# Altium PCB IP5328P BMS.PcbDoc
Units mil, origin at the board's own origin, x right, y up, seen from the top; angles counter-clockwise.
Board outline 3000 x 2500 mil, 2 copper layers (Top Layer, Bottom Layer); 48 components, 37 nets, 168 pads, 9 vias.
Unrouted connection lines stored in the file: 111.
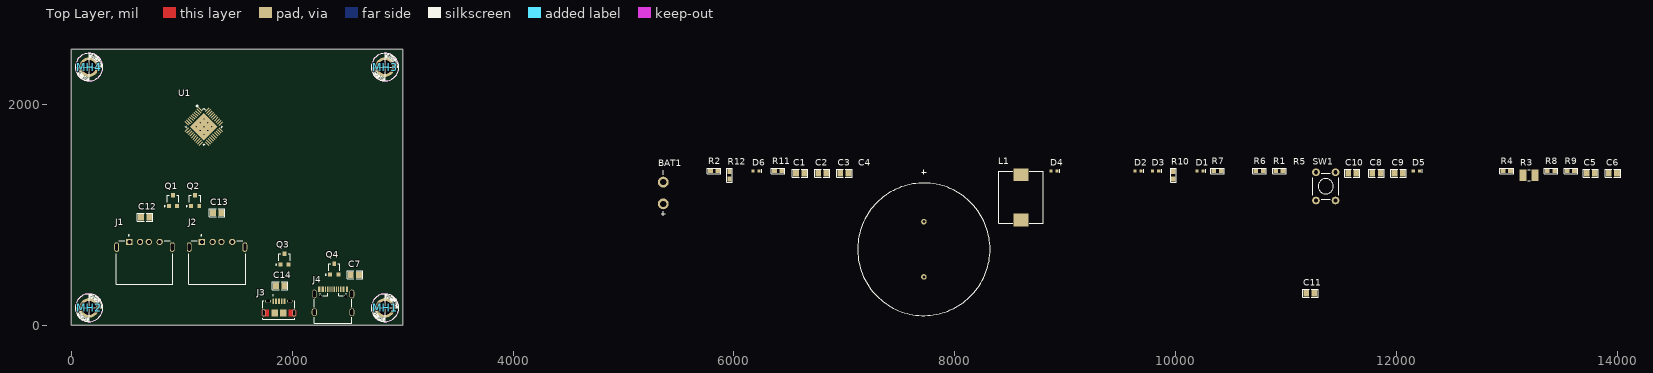
[diagram p0: Top Layer view]
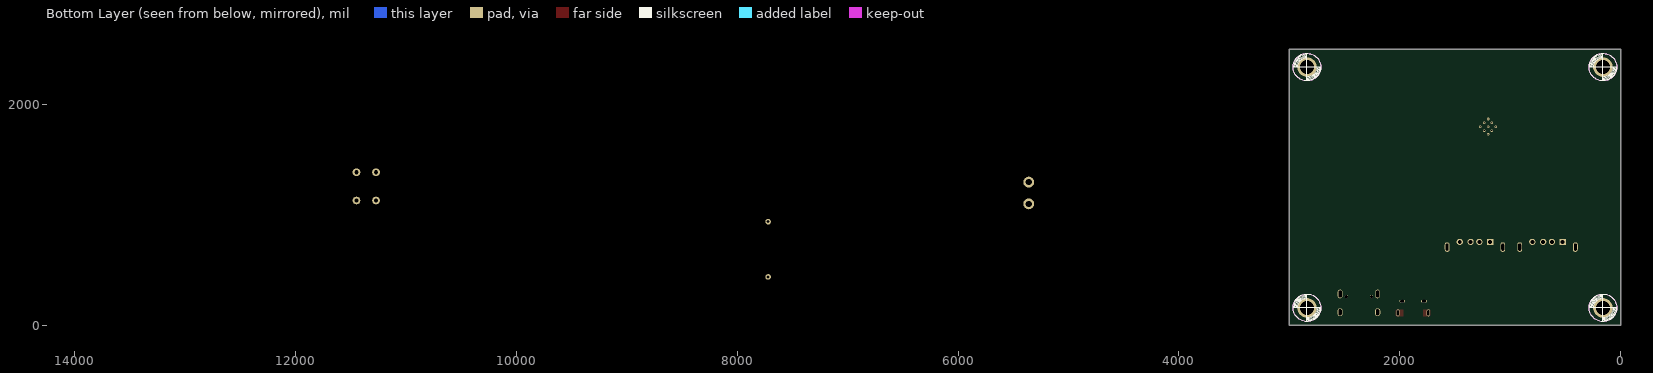
[diagram p1: Bottom Layer view, seen from below]

## Layer stack, top to bottom
Top Solder: solder mask 0.4, Solder Resist, Dk 3.5
Top Layer: signal copper 1.4
Dielectric 1: dielectric 12.6, FR-4, Dk 4.8
Bottom Layer: signal copper 1.4
Bottom Solder: solder mask 0.4, Solder Resist, Dk 3.5

## Board outline
0,0 3000,0 3000,2500 0,2500

## Design rules (kind name [scope] priority, off if disabled: settings)
Clearance [All] p1: gap=10 ignorepadtopadclearanceinfootprint=FALSE except(0: Arc-Hole Track-Hole SMDPad-Hole THPad-Hole Via-Hole Fill-Hole Poly-Hole Region-Hole Text-Hole; 7: Arc-Arc Arc-Track Track-Track; 8: SMDPad-SMDPad SMDPad-THPad)
MinimumSolderMaskSliver [All] p1: minsoldermaskwidth=3.94
PolygonConnect [All] p1: connectstyle=Relief reliefconductorwidth=10 reliefentries=4 polygonreliefangle="90 Angle" airgapwidth=10
RoutingVias [All] p1: holewidth=28 width=50 viastyle="Through Hole" minholewidth=28 minwidth=50 maxholewidth=28 maxwidth=50
SilkToSolderMaskClearance [IsPad] p1: minsilkscreentomaskgap=5 clearancetoexposedcopper=TRUE
SolderMaskExpansion [All] p1: expansion=4 istentingtop=FALSE
Width [All] p1: maxlimit=10 minlimit=10 preferedwidth=10
28 further rules are at their usual default settings.

## Components (designator, comment, footprint, x,y, rotation, side; value= is the part's Value field where it differs from the comment)
BAT1 "ICR18650C2" "Battery Wire Pads" 5360,1200 r90 top
C1 "22uF" "CAP 2012[0805]" 6600,1380 r0 top
C2 "22uF" "CAP 2012[0805]" 6800,1380 r0 top
C3 "22uF" "CAP 2012[0805]" 7000,1380 r0 top
C4 "220uF" Capacitor 7720,440 r90 top
C5 "2.2uF" "CAP 2012[0805]" 13760,1380 r0 top
C6 "2.2uF" "CAP 2012[0805]" 13960,1380 r0 top
C7 "10uF" "CAP 2012[0805]" 2567.4,460 r180 top
C8 "100nF" "CAP 2012[0805]" 11820,1380 r0 top
C9 "22uF" "CAP 2012[0805]" 12020,1380 r0 top
C10 "100nF" "CAP 2012[0805]" 11600,1380 r0 top
C11 "100nF" "CAP 2012[0805]" 11220,290 r0 top
C12 "10uF" "CAP 2012[0805]" 667.4,980 r0 top
C13 "10uF" "CAP 2012[0805]" 1320,1020 r0 top
C14 "10uF" "CAP 2012[0805]" 1890,360 r180 top
D1 "SZYY0603G" "LED 0603" 10220,1400 r0 top
D2 "SZYY0603G" "LED 0603" 9660,1400 r0 top
D3 "SZYY0603G" "LED 0603" 9820,1400 r0 top
D4 "SZYY0603G" "LED 0603" 8900,1400 r0 top
D5 "SZYY0603G" "LED 0603" 12180,1400 r0 top
D6 "SZYY0603G" "LED 0603" 6200,1400 r0 top
J1 "USB1125-GF-B_REVA" GCT_USB1125-GF-B_REVA 661.42,710 r0 top
J2 "USB1125-GF-B_REVA" GCT_USB1125-GF-B_REVA 1318.58,710 r0 top
J3 "10118194-0001LF" AMPHENOL_10118194-0001LF 1878.82,113.7 r0 top
J4 "918-418K2023S40001" 918-418K2023S40001 2200,285.35 r0 top
L1 "22uH" YSPI1050-2R2M 8600,1160 r90 top
MH1 "MH 3.2MM W/CLEARANCE" "3.2mm Mounting Hole w/clearance" 2840,160 r0 top
MH2 "MH 3.2MM W/CLEARANCE" "3.2mm Mounting Hole w/clearance" 160,160 r0 top
MH3 "MH 3.2MM W/CLEARANCE" "3.2mm Mounting Hole w/clearance" 2840,2340 r0 top
MH4 "MH 3.2MM W/CLEARANCE" "3.2mm Mounting Hole w/clearance" 160,2340 r0 top
Q1 "RU207C" SOT-23-3 920,1130 r0 top
Q2 "RU207C" SOT-23-3 1120,1130 r0 top
Q3 "RU20P7C" SOT-23-3 1930,600 r0 top
Q4 "RU20P7C" SOT-23-3 2380,510 r0 top
R1 "10K" "RES 1608[0603]" 10940,1400 r0 top
R2 "10K" "RES 1608[0603]" 5820,1400 r0 top
R3 "0.01R" "RES 3225[1210]" 13200,1360 r0 top
R4 "82K" "RES 1608[0603]" 13000,1400 r0 top
R5 "NTC 100K" "temp through hole component" 11060,1420 r90 top
R6 "100R" "RES 1608[0603]" 10760,1400 r0 top
R7 "100R" "RES 1608[0603]" 10380,1400 r0 top
R8 "100R" "RES 1608[0603]" 13400,1400 r0 top
R9 "1K" "RES 1608[0603]" 13580,1400 r0 top
R10 "100R" "RES 1608[0603]" 9980,1360 r90 top
R11 "110K" "RES 1608[0603]" 6400,1400 r0 top
R12 "Res 0R" "RES 1608[0603] EMPTY" 5960,1360 r90 top
SW1 "Switch SPST" "TACTILE SW NO" 11360,1260 r0 top
U1 "IP5328P" "QFN-40 6x6mm EP" 1200,1800 r315 top

## Footprints (in the part's own frame and the unit in brackets; to place one, negate y for a bottom-side part, rotate by r counter-clockwise, add the part's x,y. Pads: shape width x height; smd on the part's side, far side on the other; paste and mask are expansions set on the pad)
"3.2mm Mounting Hole w/clearance" [mm] "3.2mm mounting hole with 125mil clearance"
  round 4.5 hole 3.2: 1(0,0)
  Keep-Out Layer circle w0.254: c0,0 r3.175
  Keep-Out Layer circle w0.254: c0,0 r3.175
  silkscreen extent -3.17,-3.18 3.18,3.17
918-418K2023S40001 [mm]
  rect 0.5x1.3 smd mask+0.051: A1/B12(1.12,1.067) A4/B9(1.92,1.067) B1/A12(7.516,1.067) B4/A9(6.716,1.067)
  rect 0.28x1.3 smd mask+0.051: A5(3.07,1.067) A6(4.07,1.067) A7(4.566,1.067) A8(5.566,1.067) B5(6.066,1.067) B6(5.066,1.067) B7(3.57,1.067) B8(2.57,1.067)
  oval 1.1x2 hole 0.7 slot 1.6 at 90 deg mask+0.051: G1(0,0) G3(8.636,0)
  oval 1.2x1.8 hole 0.7 slot 1.4 at 90 deg mask+0.051: G2(0,-4.2) G4(8.636,-4.2)
  round 0.75 hole 0.75 unplated mask+0: NC(1.43,-0.61) NC(7.206,-0.61)
  silkscreen extent 0,-6.76 8.64,0.13
AMPHENOL_10118194-0001LF [mm]
  rect 0.4x1.35 smd mask+0.05: 1(-1.3,2.7) 2(-0.65,2.7) 3(0,2.7) 4(0.65,2.7) 5(1.3,2.7)
  oval 1.3x0.65 hole 0.55 slot 0.85 at 0 deg: S1(-2.5,2.7) S2(2.5,2.7)
  oval 0.775x1.55 hole 0.5 slot 1.15 at 90 deg: S3(-3.5,0) S6(3.5,0)
  rect 1.5x1.55 smd: S4(-1,0) S5(1,0)
  Top Layer region: 193 vertices and 0 holes, not listed, extent -4,-0.775 -2.3,0.78
  Top Layer region: 193 vertices and 0 holes, not listed, extent 2.3,-0.78 4,0.775
  silkscreen extent -3.7,-1.45 3.7,4.2, body extent -4.02,-2.66 4.02,2.92, height 2.69
"Battery Wire Pads" [mm]
  round 2.5 hole 1.4: BAT+(-2.5,0) BAT-(2.5,0)
  silkscreen extent -5.26,-0.51 5.25,0.51
"CAP 2012[0805]" [mm] "Capacitor, NP, 2012[0805]"
  rect 1.3x1.5 smd: 1(-0.95,0) 2(0.95,0)
  silkscreen extent -1.78,-0.91 1.78,0.91, body extent -0.99,-0.64 1.01,0.62, height 0.78
Capacitor [mil]
  round 50 hole 28: 1(0,0) 2(500,0)
  silkscreen extent -350,-600 970,600
GCT_USB1125-GF-B_REVA [mm]
  rect 1.428x1.428 hole 0.92: 1(-3.5,1.2)
  round 1.428 hole 0.92: 2(-1,1.2) 3(1,1.2) 4(3.5,1.2)
  oval 1.108x2.216 hole 0.6 slot 1.6 at 90 deg: S1(-6.4,0) S2(6.4,0)
  silkscreen extent -6.55,-8.55 6.55,2.8
"LED 0603" [mm] "SMT LED w/0603 footprint"
  rect 0.7x0.7 smd: 1(-0.7,0) 2(0.7,0)
  silkscreen extent 1.35,-0.38 1.35,0.38, body extent -0.8,-0.4 0.8,0.4, height 0.4
"QFN-40 6x6mm EP" [mm] "6mm x 6mm QFN-40 w/exposed pad"
  rect 1.25x0.28 smd mask+0.05: 1(-3.375,2.25) 10(-3.375,-2.25) 21(3.275,-2.25) 30(3.275,2.25)
  rect 1.35x0.28 smd mask+0.05: 2(-3.323,1.75) 3(-3.323,1.25) 4(-3.323,0.75) 5(-3.323,0.25) 6(-3.323,-0.25) 7(-3.323,-0.75) 8(-3.323,-1.25) 9(-3.322,-1.75) 22(3.225,-1.75) 23(3.225,-1.25) 24(3.225,-0.75) 25(3.225,-0.25) 26(3.225,0.25) 27(3.225,0.75) 28(3.225,1.25) 29(3.225,1.75)
  rect 0.28x1.25 smd mask+0.05: 11(-2.25,-3.275) 20(2.25,-3.275) 31(2.25,3.275) 40(-2.25,3.275)
  rect 0.28x1.35 smd mask+0.05: 12(-1.75,-3.225) 13(-1.25,-3.225) 14(-0.75,-3.225) 15(-0.25,-3.225) 16(0.25,-3.225) 17(0.75,-3.225) 18(1.25,-3.225) 19(1.75,-3.225) 32(1.75,3.225) 33(1.25,3.225) 34(0.75,3.225) 35(0.25,3.225) 36(-0.25,3.225) 37(-0.75,3.225) 38(-1.25,3.225) 39(-1.75,3.225)
  rect 4.5x4.5 smd mask+0.07: PAD(0,0)
  silkscreen extent -4.55,-3 3,3, body extent -3.08,-3.07 3.08,3.08, height 1.04
"RES 1608[0603]" [mm] "Resistor 1608[0603]"
  rect 1.1x1 smd: 1(-0.85,0) 2(0.85,0)
  silkscreen extent -1.57,-0.66 1.57,0.66, body extent -0.76,-0.41 0.84,0.39, height 0.4
"RES 1608[0603] EMPTY" [mm] "Resistor 1608[0603]"
  rect 1.1x1 smd: 1(-0.85,0) 2(0.85,0)
  silkscreen extent -1.57,-0.66 1.57,0.66
"RES 3225[1210]" [mm] "Resistor - 3225[1210]"
  rect 1.6x2.7 smd: 1(-1.4,0) 2(1.4,0)
  silkscreen extent -0.3,-1.25 0.3,1.25, body extent -1.63,-1.24 1.57,1.26, height 0.55
SOT-23-3 [mm] "SOT-23-3 (standard pin numbering)"
  rect 0.9x0.95 smd: 1(-0.95,-1.25) 2(0.95,-1.25) 3(0,1.25)
  silkscreen extent -2.07,-1.37 1.3,1.25, body extent -1.5,-1.28 1.5,1.22, height 1.06
"TACTILE SW NO" [mil] "Normally-open tactile, PTH, TE 1825910-2 or equiv"
  round 70 hole 40: 1(88.5,128) 2(88.5,-128) 3(-88.5,128) 4(-88.5,-128)
  silkscreen extent -118,-118 118,118, body extent -118,-154 118,153, height 170
"temp through hole component" [mil]
YSPI1050-2R2M [mil] "Precision Wire Wound Inductor, 2-Leads, Body 11.50x10.00mm, IPC Medium Density"
  rect 115.12x137.8 smd: 1(-205,0) 2(205,0)
  silkscreen extent -236,-203 236,203, body extent -230,-197 230,197, height 201

## Part data
BAT1: library part "Battery Multi", "Lithium Ion ICR18650 C2 2800mAh"
C1 C2 C3 C9: library part "Cap 22uF", "X5R 25V ±20% 22uF 0805 Multilayer Ceramic Capacitors MLCC - SMD/SMT ROHS", Mfg="Samsung Electro-Mechanics", Mfg PN=CL21A226MAQNNNE, Vendor=JLCPCB, Vendor PN=C45783
C4: library part "Cap 220uH Polarized"
C5 C6: library part "Cap 2.2uF", "25V 2.2uF X5R ±10% 0805 Multilayer Ceramic Capacitors MLCC - SMD/SMT ROHS", Mfg="Samsung Electro-Mechanics", Mfg PN=CL21A225KAFNNNE, Vendor=JLCPCB, Vendor PN=C87994
C7 C12 C13 C14: library part "Cap 10uF", "X5R 25V ±10% 10uF 0805 Multilayer Ceramic Capacitors MLCC - SMD/SMT ROHS", Mfg="Samsung Electro-Mechanics", Mfg PN=CL21A106KAYNNNE, Vendor=JLCPCB, Vendor PN=C15850
C8 C10 C11: library part "Cap 100nF", "100V 100nF X7R ±10% 0805 Multilayer Ceramic Capacitors MLCC - SMD/SMT ROHS", Mfg="Samsung Electro-Mechanics", Mfg PN=CL21B104KCFNNNE, Vendor=JLCPCB, Vendor PN=C28233
D1 D2 D3 D4 D5 D6: library part LED, "Emerald 0603 Light Emitting Diodes (LED) ROHS", Mfg="Yongyu Photoelectric", Mfg PN=SZYY0603G, Vendor=JLCPCB, Vendor PN=C434420
J1 J2: "USB 2.0 Receptacle, Type A,Through Hole, Horizontal, Top Mount, Without Flange", Package=Package, Availability=Unavailable, MF="Global Connector Technology", MP=USB1125-GF-B, Price=None, SnapEDA_Link=https://www.snapeda.com/parts/USB1125-GF-B/Global%20Connector%20Technology/view-part/4792084/?ref=snap
J3: "USB - micro B USB 2.0 Receptacle Connector 5 Position Surface Mount, Right Angle; Through Hole", Package=None, Availability=Unavailable, MF="Amphenol ICC", MP=10118194-0001LF, Price=None, SnapEDA_Link=https://www.snapeda.com/parts/10118194-0001LF/Amphenol%20FCI/view-part/1413308/?ref=snap
J4: "3A 1 16 Female Type-C SMD USB Connectors ROHS", Mfg="Jing Extension of the Electronic Co.", Mfg PN=918-418K2023S40001, Vendor=JLCPCB, Vendor PN=C167321
L1: library part "Power Inductor 22uH", "10A 2.2uH ±20% 6.6mΩ SMD,11.5x10x5mm Power Inductors ROHS", Mfg=YJYCOIN, Mfg PN=YSPI1050-2R2M, Vendor=JLCPCB, Vendor PN=C497893
Q1 Q2: "SOT-23-3 MOSFETs ROHS 20V/6A,", Mfg="Shenzhen ruichips Semicon", Mfg PN=RU207C, Vendor=LCSC, Vendor PN=C515680
Q3 Q4: "20V 5A 28mΩ@4.5V,5A 1.3W 1.1V@250μA P Channel SOT-23(SOT-23-3) MOSFETs ROHS", Mfg="Shenzhen ruichips Semicon", Mfg PN=RU20P7C, Vendor=LCSC, Vendor PN=C181984
R1 R2: library part "Res 10K", "±1% 1/10W Thick Film Resistors 75V ±100ppm/℃ -55℃~+155℃ 10kΩ 0603 Chip Resistor - Surface Mount ROHS", Mfg="UNI-ROYAL(Uniroyal Elec)", Mfg PN=0603WAF1002T5E, Vendor=JLCPCB, Vendor PN=C25804
R3: library part "Res 0.01R", "±1% 1/2W Thick Film Resistors 200V ±1500ppm/℃ -55℃~+155℃ 0.01Ω 1210 Chip Resistor - Surface Mount ROHS", Mfg=RALEC, Mfg PN=RTT12R010FTP, Vendor=JLCPCB, Vendor PN=C159310
R4: library part "Res 82K", "±1% 1/10W Thick Film Resistors 75V ±100ppm/℃ -55℃~+155℃ 82kΩ 0603 Chip Resistor - Surface Mount ROHS", Mfg="UNI-ROYAL(Uniroyal Elec)", Mfg PN=0603WAF8202T5E, Vendor=JLCPCB, Vendor PN=C23254
R5: library part "Thermistor 100K", "THERM NTC 100KOHM 4250K BEAD", Mfg="Murata Electronics", Mfg PN=NXFT15WF104FA1B025, Vendor=Digikey, Vendor PN=490-11856-ND
R6 R7 R8 R10: library part "Res 100R", "±1% 1/10W Thick Film Resistors 75V ±200ppm/℃ -55℃~+155℃ 100Ω 0603 Chip Resistor - Surface Mount ROHS", Mfg="UNI-ROYAL(Uniroyal Elec)", Mfg PN=0603WAF1000T5E, Vendor=JLCPCB, Vendor PN=C22775
R9: library part "Res 1K", "±1% 1/10W Thick Film Resistors 75V ±100ppm/℃ -55℃~+155℃ 1kΩ 0603 Chip Resistor - Surface Mount ROHS", Mfg="UNI-ROYAL(Uniroyal Elec)", Mfg PN=0603WAF1001T5E, Vendor=JLCPCB, Vendor PN=C21190
R11: library part "Res 110K", "±1% 1/10W Thick Film Resistors 75V ±100ppm/℃ -55℃~+155℃ 110kΩ 0603 Chip Resistor - Surface Mount ROHS", Mfg="UNI-ROYAL(Uniroyal Elec)", Mfg PN=0603WAF1103T5E, Vendor=JLCPCB, Vendor PN=C25805
SW1: "Tactile Switch SPST-NO Top Actuated Surface Mount", Mfg=E-Switch, Mfg PN=TL3305AF260QG, Vendor=Digikey, Vendor PN=EG5353TR-ND
U1: "QFN-40_6x6x05P Battery Management ICs ROHS", Mfg=INJOINIC, Mfg PN=IP5328P, Vendor=JLCPCB, Vendor PN=C188809

## Via types
v1: diameter 23.62, hole 11.81, Top Layer to Bottom Layer, tented top, 9 vias

## Nets (pads, with @x,y where several pads share a name; then routed paths per layer and width w, separated by ;. In a path a pad name is that pad's centre, name@x,y a point inside that pad or via, vN(x,y) a via of type N, cw(c..) or ccw(c..) an arc to the next point about the centre after c; other vN are vias at no path point)
CC1: J4.A5 U1.2
CC2: J4.B5 U1.3
DMA1: J1.2 U1.38
DMA2: J2.2 U1.40
DMB: J3.2 U1.6
DMC: J4.A7 J4.B7 U1.4
DPA1: J1.3 U1.39
DPA2: J2.3 U1.1
DPB: J3.3 U1.7
DPC: J4.A6 J4.B6 U1.5
GND: C1.1 C2.1 C3.1 C4.2 C5.1 C6.1 C7.1 C8.2 C9.2 C10.2 C12.1 C13.1 C14.1 D5.2 D6.2 J1.4 J1.S1 J1.S2 J2.4 J2.S1 J2.S2 J3.4 J3.5 J3.S1 J4.A1/B12 J4.B1/A12 J4.G1 J4.G2 J4.G3 J4.G4 R4.1 R11.2 R12.1 SW1.2 U1.29
KEY: R8.2 R9.2 U1.26
NetC11_1: C11.1 U1.19
NetC11_2: C11.2 L1.1 U1.14 U1.15 U1.16 U1.17 U1.18
NetD1_1: D1.1 D2.2 D3.1 D4.2 R12.2 U1.13
NetD1_2: D1.2 D2.1 R6.2
NetD3_2: D3.2 D4.1 R7.1
NetD5_1: D5.1 R8.1
NetD6_1: D6.1 R10.2
NetR4_2: R4.2 U1.10
NetR6_1: R6.1 U1.11
NetR7_2: R7.2 U1.12
NetR9_1: R9.1 SW1.1
NetR10_1: R10.1 U1.20
NetR11_1: R11.1 U1.21
VBAT: C6.2 L1.2 U1.28
VBUS: C7.2 Q4.1 U1.32
VBUSG: Q4.2 R2.1 U1.33
VIN: C14.2 J3.1 Q3.3 U1.30
VING: Q3.2 R1.1 U1.31
VMID: C9.1 C10.1 Q1.3 Q2.3 Q3.1 Q4.3 R1.2 R2.2 R3.1 U1.25
VOUT1: C12.2 J1.1 Q1.1 U1.37
VOUT1G: Q1.2 U1.36
VOUT2: C13.2 J2.1 Q2.1 U1.34
VOUT2G: Q2.2 U1.35
VREG: C5.2 U1.27
VSYS: C1.2 C2.2 C3.2 C4.1 C8.1 R3.2 U1.8 U1.9 U1.22 U1.23 U1.24
pads on no net: BAT1.BAT+ BAT1.BAT- J3.S2 J3.S3 J3.S4 J3.S5 J3.S6 J4.A4/B9 J4.A8 J4.B4/A9 J4.B8 J4.NC MH1.1 MH2.1 MH3.1 MH4.1 SW1.3 SW1.4 U1.PAD
copper on no net:
  other v1: 1200,1730.4 1165.2,1765.2 1234.8,1765.2 1130.4,1800 1200,1800 1269.6,1800 1165.2,1834.8 1234.8,1834.8 1200,1869.6

## Text inside footprints (layer, text, board x,y; h text height)
J3: Mechanical 13 "PCB END" at 1802.05,31.02 h19.68